# Altium PCB CuC_PCB.PcbDoc (part 3 of 4)
Units mm, origin at the board's own origin, x right, y up, seen from the top; angles counter-clockwise.
Board outline 203.71 x 204.22 mm, 2 copper layers (Top Layer, Bottom Layer); 421 components, 374 nets, 1366 pads, 155 vias.
Unrouted connection lines stored in the file: 2.
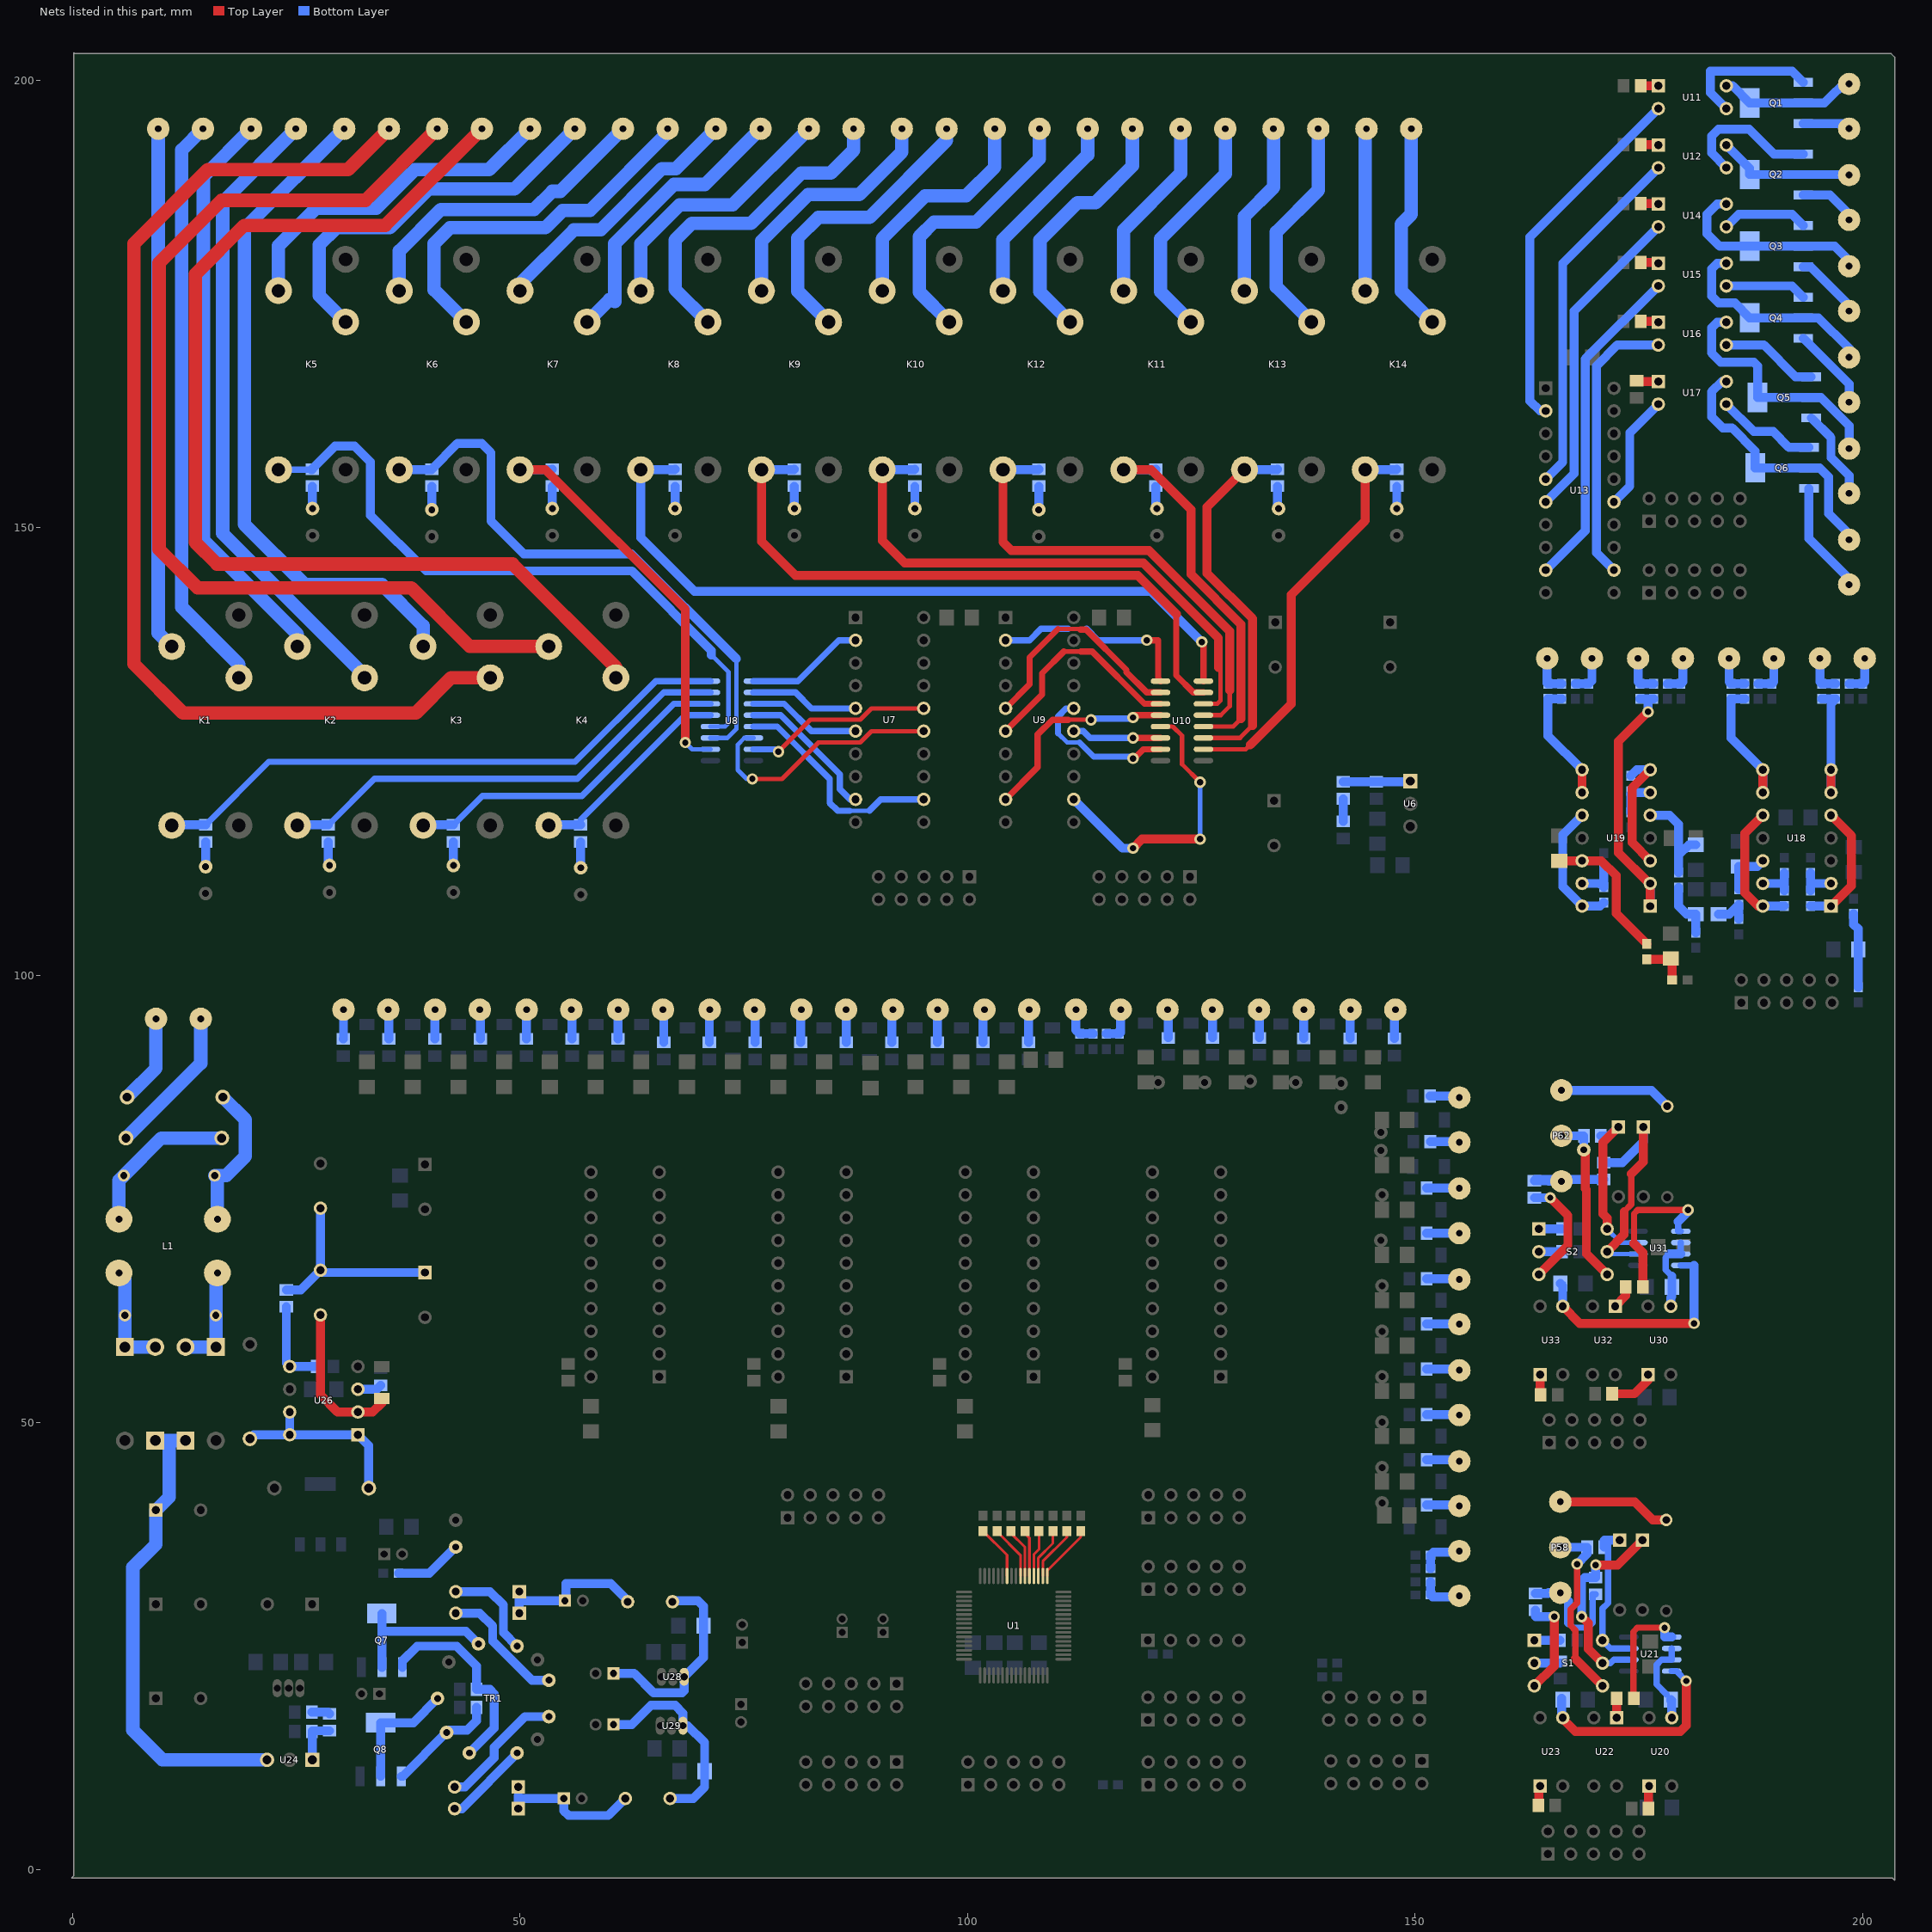
[diagram p3: the nets of this part, all layers, seen from the top]

## Via types
v1: diameter 1.27, hole 0.711, Top Layer to Bottom Layer, 155 vias

## Nets (pads, with @x,y where several pads share a name; then routed paths per layer and width w, separated by ;. In a path a pad name is that pad's centre, name@x,y a point inside that pad or via, vN(x,y) a via of type N, cw(c..) or ccw(c..) an arc to the next point about the centre after c; other vN are vias at no path point) (continued)
NetC52_2: C52.2 R81.2 R82.1 | length 8.4
  Bottom Layer w1: R81.2@199.009,106.846 199.009,105.664 199.52,105.153 C52.2@199.52,102.87 199.517,102.867 R82.1@199.517,98.64
NetC53_2: C53.2 R89.1 U18.12 | length 5.5
  Bottom Layer w1: R89.1@186.182,109.562 C53.2@186.182,112.138 188.211,112.138 U18.12@188.849,112.776
NetC54_2: C54.2 R89.2 R90.1 | length 4.3
  Bottom Layer w1: C54.2@183.896,106.804 185.124,106.804 R89.2@186.182,107.862 R90.1@186.182,106.26
NetC56_2: C56.2 R97.1 U19.5 | length 11.3
  Bottom Layer w1: U19.5@176.276,117.856 178.435,117.856 179.451,116.84 179.451,113.411 ; R97.1@179.451,111.467 179.451,113.411 ; C56.2@181.356,114.557 180.597,114.557 179.451,113.411
NetC57_2: C57.2 R97.2 R98.1 | length 6.4
  Bottom Layer w1: R97.2@179.451,109.767 179.451,107.696 180.343,106.804 C57.2@181.356,106.804 R98.1@181.356,104.736
NetC59_2: C59.2 R105.1 U19.12 | length 16.1
  Top Layer w1: C59.2@166.116,112.773 168.653,112.773 U19.12@168.656,112.776 170.815,112.776 172.466,111.125 172.466,106.895 R105.1@175.895,103.466
NetC60_2: C60.2 R105.2 R106.1 | length 5.2
  Top Layer w1: R105.2@175.895,101.766 178.477,101.766 C60.2@178.562,101.851 178.728,101.685 R106.1@178.728,99.441
NetC62_1: C62.1 D49.2 D51.2 U24.3 | length 53.8
  Bottom Layer w1.5: D51.2@9.229,47.983 10.795,47.983 ; D49.2@12.615,47.983 10.795,47.983 ; U24.3@21.717,12.319 10.033,12.319 6.731,15.621 6.731,33.829 9.311,36.409 C62.1@9.311,40.208 10.795,41.692 10.795,47.983
NetC67_1: C67.1 D51.1 D52.2 L1.4 | length 11.9
  Bottom Layer w1.5: L1.4@5.168,66.723 5.842,66.049 C67.1@5.842,61.976 D52.2@5.842,58.443 D51.1@9.229,58.443
NetC67_2: C67.2 D49.1 D50.2 L1.2 | length 11.7
  Bottom Layer w1.5: D49.1@12.615,58.443 D50.2@16.002,58.443 C67.2@16.002,61.976 16.002,66.557 L1.2@16.168,66.723
NetC68_1: C68.1 L1.3 R127.1 | length 17.8
  Bottom Layer w1.5: L1.3@5.168,72.723 5.168,77.05 C68.1@5.715,77.597 9.906,81.788 R127.1@16.653,81.788
NetC68_2: C68.2 L1.1 R124.1 | length 17
  Bottom Layer w1.5: L1.1@16.168,72.723 16.168,77.304 C68.2@15.875,77.597 17.145,77.597 19.304,79.756 19.304,83.836 R124.1@16.78,86.36
NetC73_1: C73.1 L2.2 L3.1 R132.2 | length 23.4
  Bottom Layer w1: R132.2@23.876,64.831 25.501,64.831 L2.2@27.686,67.016 ; L3.1@27.686,73.954 L2.2@27.686,67.016 ; C73.1@39.37,66.762 27.94,66.762 L2.2@27.686,67.016
NetC74_2: C74.2 U26.3 | length 2.7
  Bottom Layer w1: U26.3@31.877,53.721 33.97,53.721 C74.2@34.417,54.168
NetC78_2: C78.2 C80.1 L4.2 U28.3 | length 22.9
  Bottom Layer w1: C80.1@60.436,21.971 62.738,21.971 64.897,19.812 68.072,19.812 68.326,20.066 U28.3@68.326,21.59 70.488,23.752 C78.2@70.488,27.305 70.488,29.461 69.85,30.099 L4.2@67.016,30.099
NetC82_1: C82.1 D55.2 D56.2 L4.1 | length 16.3
  Bottom Layer w1: D56.2@49.905,28.702 49.905,30.232 50.038,30.099 C82.1@55.007,30.099 55.118,30.21 55.118,32.004 60.111,32.004 L4.1@62.016,30.099
NetC83_2: C83.2 C85.1 L5.2 U29.3 | length 23
  Bottom Layer w1: C85.1@60.436,16.383 60.563,16.256 62.484,16.256 64.643,18.415 67.31,18.415 68.199,17.526 U29.3@68.199,16.129 68.707,16.129 70.615,14.221 C83.2@70.615,11.049 70.615,9.274 69.342,8.001 L5.2@66.762,8.001
NetC87_1: C87.1 D57.2 D58.2 L5.1 | length 15.9
  Bottom Layer w1: D58.2@49.778,6.858 49.778,8.261 50.038,8.001 C87.1@54.88,8.001 54.88,6.62 55.404,6.096 59.857,6.096 L5.1@61.762,8.001
NetD33_1: D33.1 R57.1 | length 2.8
  Bottom Layer w1: D33.1@14.859,112.117 R57.1@14.859,114.874
NetD34_1: D34.1 R62.1 | length 2.6
  Bottom Layer w1: D34.1@42.545,112.244 R62.1@42.545,114.874
NetD35_1: D35.1 R61.1 | length 2.8
  Bottom Layer w1: R61.1@28.575,114.874 28.575,112.244 D35.1@28.702,112.117
NetD36_1: D36.1 R63.1 | length 2.8
  Bottom Layer w1: D36.1@56.769,112.117 R63.1@56.769,114.874
NetD37_1: D37.1 R64.1 | length 2.5
  Bottom Layer w1: D37.1@26.797,152.122 R64.1@26.797,154.625
NetD38_1: D38.1 R65.1 | length 2.6
  Bottom Layer w1: D38.1@40.132,151.995 R65.1@40.132,154.625
NetD39_1: D39.1 R66.1 | length 2.5
  Bottom Layer w1: D39.1@53.594,152.122 R66.1@53.594,154.625
NetD40_1: D40.1 R67.1 | length 2.5
  Bottom Layer w1: D40.1@67.31,152.122 R67.1@67.31,154.625
NetD41_1: D41.1 R68.1 | length 2.5
  Bottom Layer w1: D41.1@80.645,152.122 R68.1@80.645,154.625
NetD42_1: D42.1 R69.1 | length 2.5
  Bottom Layer w1: D42.1@94.107,152.122 R69.1@94.107,154.625
NetD43_1: D43.1 R70.1 | length 2.6
  Bottom Layer w1: D43.1@107.95,151.995 R70.1@107.95,154.625
NetD44_1: D44.1 R71.1 | length 2.6
  Bottom Layer w1: D44.1@121.031,151.995 R71.1@121.031,154.625
NetD45_1: D45.1 R72.1 | length 2.7
  Bottom Layer w1: R72.1@134.62,154.625 134.62,152.122 D45.1@134.747,151.995
NetD46_1: D46.1 R73.1 | length 2.5
  Bottom Layer w1: D46.1@147.955,152.122 R73.1@147.955,154.625
NetD47_2: D47.2 R115.2 S1.5 U21.6 | length 22.7
  Top Layer w1: v1(168.605,28.321) 169.342,27.584 169.342,24.714 S1.5@170.942,23.114 ; v1(170.18,34.087) 172.615,34.087 D47.2@175.387,36.859
  Bottom Layer w0.7: S1.5@170.942,23.114 171.831,23.114 172.212,23.495 U21.6@173.876,23.495
  Bottom Layer w1: v1(168.605,28.321) 168.605,32.332 168.974,32.7 R115.2@170.18,32.7 v1(170.18,34.087)
NetD48_2: D48.2 R117.2 S1.6 U21.7 | length 17.3
  Bottom Layer w0.7: 171.552,36.859 171.552,29.82 170.942,29.21 S1.6@170.942,25.654 171.831,24.765 U21.7@173.876,24.765
  Bottom Layer w1: R117.2@171.13,36.068 171.13,36.83 171.159,36.859 171.552,36.859 D48.2@172.847,36.859
NetD53_2: D53.2 L2.1 U26.2 | length 17.5
  Top Layer w1: L2.1@27.686,62.016 27.686,53.086 29.591,51.181 U26.2@31.877,51.181 33.528,51.181 34.544,52.197 D53.2@34.544,52.708
NetD54_2: D54.2 R131.2 | length 7.6
  Bottom Layer w1: R131.2@36.41,33.147 39.854,33.147 D54.2@42.799,36.092
NetD55_1: D55.1 TR1.6 | length 11.2
  Bottom Layer w1: D55.1@42.805,31.115 46.609,31.115 48.133,29.591 48.133,26.543 TR1.6@49.657,25.019
NetD56_1: D56.1 TR1.8 | length 14.5
  Bottom Layer w1: D56.1@42.805,28.702 45.466,28.702 46.933,27.235 46.933,25.584 51.308,21.209 TR1.8@53.213,21.209
NetD57_1: D57.1 TR1.9 | length 14.5
  Bottom Layer w1: D57.1@42.678,9.271 43.815,9.271 47.117,12.573 47.117,13.716 50.546,17.145 TR1.9@53.213,17.145
NetD58_1: D58.1 TR1.11 | length 9.6
  Bottom Layer w1: D58.1@42.678,6.858 43.48,6.858 49.657,13.035 TR1.11@49.657,13.081
NetD59_2: D59.2 R139.2 S2.5 U31.6 | length 26.2
  Top Layer w0.7: 173.359,73.586 174.164,74.391 174.164,77.771
  Top Layer w1: S2.5@171.45,69.088 173.359,70.997 173.359,73.586 ; 174.164,77.771 175.514,79.121 D59.2@175.514,83.034
  Bottom Layer w0.5: S2.5@171.45,69.088 171.704,68.834 U31.6@174.892,68.834
  Bottom Layer w1: R139.2@171.069,79.055 173.162,79.055 175.514,81.407 D59.2@175.514,83.034
NetD60_2: D60.2 R141.2 S2.6 U31.7 | length 18.8
  Top Layer w1: S2.6@171.45,71.628 171.45,72.847 170.993,73.304 170.993,81.307 D60.2@172.72,83.034
  Bottom Layer w0.5: S2.6@171.45,71.628 172.974,70.104 U31.7@174.892,70.104
  Bottom Layer w1: R141.2@170.749,82.042 171.728,82.042 D60.2@172.72,83.034
NetK1_2: K1.2 R57.2 U8.16 | length 66.9
  Bottom Layer w0.7: R57.2@14.859,116.774 21.91,123.825 56.134,123.825 65.156,132.847 U8.16@71.26,132.847
  Bottom Layer w1: K1.2@11.074,116.716 11.132,116.774 R57.2@14.859,116.774
NetK1_3: K1.3 P25.1 | length 65
  Bottom Layer w1.5: P25.1@14.565,194.564 12.192,192.191 12.192,141.097 18.574,134.715 K1.3@18.574,133.216
NetK1_4: K1.4 P25.2 | length 58.5
  Bottom Layer w1.5: P25.2@9.565,194.564 9.565,138.225 K1.4@11.074,136.716
NetK2_2: K2.2 R61.2 U8.15 | length 52.3
  Bottom Layer w0.7: R61.2@28.575,116.774 33.721,121.92 56.388,121.92 66.045,131.577 U8.15@71.26,131.577
  Bottom Layer w1: K2.2@25.116,116.716 25.174,116.774 R61.2@28.575,116.774
NetK2_3: K2.3 P26.1 | length 71.3
  Bottom Layer w1.5: P26.1@24.95,194.564 16.764,186.378 16.764,149.352 32.616,133.5 K2.3@32.616,133.216
NetK2_4: K2.4 P26.2 | length 64.4
  Bottom Layer w1.5: P26.2@19.95,194.564 14.605,189.219 14.605,148.59 25.116,138.079 K2.4@25.116,136.716
NetK3_2: K3.2 R62.2 U8.14 | length 37.7
  Bottom Layer w0.7: R62.2@42.545,116.774 45.786,120.015 56.896,120.015 67.188,130.307 U8.14@71.26,130.307
  Bottom Layer w1: K3.2@39.157,116.716 39.215,116.774 R62.2@42.545,116.774
NetK3_3: K3.3 P27.1 | length 124.5
  Top Layer w1.5: P27.1@35.334,194.564 30.762,189.992 15.113,189.992 6.858,181.737 6.858,134.747 12.319,129.286 38.354,129.286 42.284,133.216 K3.3@46.657,133.216
NetK3_4: K3.4 P27.2 | length 75.8
  Bottom Layer w1.5: P27.2@30.334,194.564 19.177,183.407 19.177,150.368 25.908,143.637 34.544,143.637 39.157,139.024 K3.4@39.157,136.716
NetK4_2: K4.2 R63.2 U8.13 | length 23.5
  Bottom Layer w0.7: R63.2@56.769,116.774 56.769,117.348 68.458,129.037 U8.13@71.26,129.037
  Bottom Layer w1: K4.2@53.199,116.716 53.257,116.774 R63.2@56.769,116.774
NetK4_3: K4.3 P28.1 | length 122.6
  Top Layer w1.5: P28.1@45.719,194.564 34.924,183.769 19.177,183.769 13.716,178.308 13.716,148.336 16.129,145.923 49.149,145.923 60.699,134.373 K4.3@60.699,133.216
NetK4_4: K4.4 P28.2 | length 117.3
  Top Layer w1.5: P28.2@40.719,194.564 32.718,186.563 16.637,186.563 9.652,179.578 9.652,147.574 13.97,143.256 37.846,143.256 44.386,136.716 K4.4@53.199,136.716
NetK5_2: K5.2 R64.2 U8.12 | length 73.7
  Bottom Layer w0.5: U8.12@71.26,127.767 72.903,127.767 73.279,128.143 73.279,133.858 71.374,135.763
  Bottom Layer w0.7: K5.2@23.002,156.467 R64.2@26.673,156.467
  Bottom Layer w1: R64.2@26.797,156.525 26.739,156.467 26.673,156.467 26.764,156.558 29.337,159.131 31.496,159.131 33.274,157.353 33.274,151.384 39.497,145.161 62.484,145.161 71.374,136.271 71.374,135.763
NetK5_3: K5.3 P29.1 | length 43.8
  Bottom Layer w1.5: K5.3@30.502,172.967 27.559,175.91 27.559,181.61 29.464,183.515 35.433,183.515 39.751,187.833 49.373,187.833 P29.1@56.104,194.564
NetK5_4: K5.4 P29.2 | length 38.5
  Bottom Layer w1.5: K5.4@23.002,176.467 23.002,181.498 27.178,185.674 33.909,185.674 38.227,189.992 46.532,189.992 P29.2@51.104,194.564
NetK6_2: K6.2 R65.2 U8.11 | length 64.5
  Bottom Layer w0.5: U8.11@71.26,126.497 73.157,126.497 74.168,127.508 74.168,135.33
  Bottom Layer w1: K6.2@36.494,156.467 40.074,156.467 R65.2@40.132,156.525 42.992,159.385 45.72,159.385 46.736,158.369 46.736,150.749 50.419,147.066 62.432,147.066 74.168,135.33
NetK6_3: K6.3 P30.1 | length 41.9
  Bottom Layer w1.5: K6.3@43.994,172.967 40.386,176.575 40.386,181.737 42.164,183.515 52.832,183.515 54.737,185.42 57.785,185.42 66.488,194.123 P30.1@66.488,194.564
NetK6_4: K6.4 P30.2 | length 35.1
  Bottom Layer w1.5: K6.4@36.494,176.467 36.494,180.893 41.148,185.547 51.562,185.547 53.594,187.579 54.503,187.579 P30.2@61.488,194.564
NetK7_2: K7.2 R66.2 U8.10 | length 46.6
  Top Layer w1: K7.2@49.985,156.467 52.829,156.467 68.453,140.843 v1(68.453,125.984)
  Bottom Layer w0.5: v1(68.453,125.984) 69.21,125.227 U8.10@71.26,125.227
  Bottom Layer w1: K7.2@49.985,156.467 53.536,156.467 R66.2@53.594,156.525
NetK7_3: K7.3 P31.1 | length 32.2
  Bottom Layer w1.5: K7.3@57.485,172.967 59.989,175.471 60.579,175.262 60.579,181.737 67.183,188.341 70.65,188.341 P31.1@76.873,194.564
NetK7_4: K7.4 P31.2 | length 29.8
  Bottom Layer w1.5: K7.4@49.985,176.467 49.97,176.481 49.97,177.224 56.007,183.261 58.987,183.261 65.821,190.095 67.404,190.095 P31.2@71.873,194.564
NetK8_2: K8.2 R67.2 U10.16 | length 83.7
  Top Layer w0.7: v1(126.174,137.224) 126.111,137.16 125.984,137.16 126.352,136.792 U10.16@126.352,132.847
  Bottom Layer w1: R67.2@67.31,156.525 67.252,156.467 K8.2@63.476,156.467 63.476,148.868 69.469,142.875 120.523,142.875 v1(126.174,137.224)
NetK8_3: K8.3 P32.1 | length 37.2
  Bottom Layer w1.5: K8.3@70.976,172.967 67.31,176.633 67.31,182.118 69.183,183.991 75.787,183.991 81.407,189.611 84.709,189.611 87.258,192.16 P32.1@87.258,194.564
NetK8_4: K8.4 P32.2 | length 29.4
  Bottom Layer w1.5: K8.4@63.476,176.467 63.476,181.713 67.818,186.055 73.749,186.055 P32.2@82.258,194.564
NetK9_2: K9.2 R68.2 U10.15 | length 72.1
  Top Layer w0.7: 123.317,140.335 123.317,133.477 125.217,131.577 U10.15@126.352,131.577
  Top Layer w1: K9.2@76.967,156.467 76.967,148.458 80.772,144.653 118.999,144.653 123.317,140.335
  Bottom Layer w1: K9.2@76.967,156.467 80.587,156.467 R68.2@80.645,156.525
NetK9_3: K9.3 P33.1 | length 33.3
  Bottom Layer w1.5: K9.3@84.467,172.967 81.026,176.408 81.026,182.372 83.312,184.658 89.027,184.658 97.643,193.274 P33.1@97.643,194.564
NetK9_4: K9.4 P33.2 | length 27.9
  Bottom Layer w1.5: K9.4@76.967,176.467 76.967,181.996 82.169,187.198 87.884,187.198 92.643,191.957 P33.2@92.643,194.564
NetK10_2: K10.2 R69.2 U10.14 | length 62.8
  Top Layer w0.5: U10.14@126.352,130.307 127.894,130.307 128.27,130.683 128.27,134.117 128.016,134.371
  Top Layer w1: K10.2@90.459,156.467 90.459,148.555 92.964,146.05 119.634,146.05 128.016,137.668 128.016,134.371
  Bottom Layer w1: K10.2@90.459,156.467 94.049,156.467 R69.2@94.107,156.525
NetK10_3: K10.3 P34.1 | length 31.3
  Bottom Layer w1.5: K10.3@97.959,172.967 94.615,176.311 94.615,182.499 96.266,184.15 100.965,184.15 108.027,191.212 P34.1@108.027,194.564
NetK10_4: K10.4 P34.2 | length 26
  Bottom Layer w1.5: K10.4@90.459,176.467 90.459,182.28 95.25,187.071 99.822,187.071 103.027,190.276 P34.2@103.027,194.564
NetK11_2: K11.2 R71.2 U10.12 | length 43.2
  Top Layer w0.5: U10.12@126.352,127.767 129.672,127.767 130.556,128.651
  Top Layer w1: K11.2@117.441,156.467 120.52,156.467 124.968,152.019 124.968,144.78 130.556,139.192 130.556,128.651
  Bottom Layer w1: K11.2@117.441,156.467 120.973,156.467 R71.2@121.031,156.525
NetK11_3: K11.3 P36.1 | length 26
  Bottom Layer w1.5: K11.3@124.941,172.967 121.539,176.369 121.539,182.245 128.797,189.503 P36.1@128.797,194.564
NetK11_4: K11.4 P36.2 | length 20.7
  Bottom Layer w1.5: K11.4@117.441,176.467 117.441,183.227 123.797,189.583 P36.2@123.797,194.564
NetK12_2: K12.2 R70.2 U10.13 | length 53.3
  Top Layer w0.5: U10.13@126.352,129.037 128.275,129.037 129.286,130.048 129.286,131.826
  Top Layer w1: K12.2@103.95,156.467 103.95,148.399 104.902,147.447 120.264,147.447 129.286,138.425 129.286,131.826
  Bottom Layer w1: K12.2@103.95,156.467 107.892,156.467 R70.2@107.95,156.525
NetK12_3: K12.3 P35.1 | length 28.5
  Bottom Layer w1.5: K12.3@111.45,172.967 108.077,176.34 108.077,182.118 112.268,186.309 114.3,186.309 118.412,190.421 P35.1@118.412,194.564
NetK12_4: K12.4 P35.2 | length 22
  Bottom Layer w1.5: K12.4@103.95,176.467 103.95,182.182 113.412,191.644 P35.2@113.412,194.564
NetK13_2: K13.2 R72.2 U10.11 | length 42.2
  Top Layer w0.5: U10.11@126.352,126.497 130.434,126.497 131.826,127.889
  Top Layer w1: K13.2@130.933,156.467 126.746,152.28 126.746,144.907 131.826,139.827 131.826,127.889
  Bottom Layer w1: K13.2@130.933,156.467 134.562,156.467 R72.2@134.62,156.525
NetK13_3: K13.3 P39.1 | length 25.2
  Bottom Layer w1.5: K13.3@138.433,172.967 134.493,176.907 134.493,183.007 139.181,187.695 P39.1@139.181,194.564
NetK13_4: K13.4 P39.2 | length 19.4
  Bottom Layer w1.5: K13.4@130.933,176.467 130.933,184.781 134.181,188.029 P39.2@134.181,194.564
NetK14_2: K14.2 R73.2 U10.10 | length 45
  Top Layer w0.5: U10.10@126.352,125.227 131.069,125.227 131.572,125.73
  Top Layer w1: 131.572,125.73 136.144,130.302 136.144,142.494 144.424,150.774 K14.2@144.424,156.467
  Bottom Layer w1: K14.2@144.424,156.467 147.897,156.467 R73.2@147.955,156.525
NetK14_3: K14.3 P40.1 | length 23.5
  Bottom Layer w1.5: P40.1@149.566,194.564 149.566,184.999 148.463,183.896 148.463,176.428 K14.3@151.924,172.967
NetK14_4: K14.4 P40.2 | length 18.2
  Bottom Layer w1.5: K14.4@144.424,176.467 144.424,194.422 P40.2@144.566,194.564
NetP7_1: P7.1 R17.1 | length 3.7
  Bottom Layer w1: P7.1@76.183,96.139 76.243,96.08 R17.1@76.243,92.479
NetP7_2: P7.2 R15.1 | length 3.7
  Bottom Layer w1: R15.1@71.145,92.479 71.145,96.101 P7.2@71.183,96.139
NetP8_1: P8.1 R18.1 | length 3.3
  Bottom Layer w1: P8.1@35.266,96.139 35.343,96.062 R18.1@35.343,92.86
NetP8_2: P8.2 R16.1 | length 3.3
  Bottom Layer w1: R16.1@30.226,92.86 30.266,92.9 P8.2@30.266,96.139
NetP9_1: P9.1 R21.1 | length 3.6
  Bottom Layer w1: R21.1@86.437,92.479 P9.1@86.437,96.115
NetP9_2: P9.2 R19.1 | length 3.6
  Bottom Layer w1: R19.1@81.34,92.479 P9.2@81.34,96.066
NetP10_1: P10.1 R22.1 | length 3.3
  Bottom Layer w1: P10.1@45.495,96.139 45.578,96.056 R22.1@45.578,92.86
NetP10_2: P10.2 R20.1 | length 3.3
  Bottom Layer w1: R20.1@40.461,92.86 40.461,96.105 P10.2@40.495,96.139
NetP11_1: P11.1 R25.1 | length 3.7
  Bottom Layer w1: R25.1@96.631,92.479 96.631,96.128 P11.1@96.642,96.139
NetP11_2: P11.2 R23.1 | length 3.6
  Bottom Layer w1: R23.1@91.534,92.479 P11.2@91.534,96.031
NetP12_1: P12.1 R26.1 | length 3.3
  Bottom Layer w1: P12.1@55.725,96.139 55.813,96.05 R26.1@55.813,92.86
NetP12_2: P12.2 R24.1 | length 3.3
  Bottom Layer w1: R24.1@50.696,92.86 50.696,96.11 P12.2@50.725,96.139
NetP13_1: P13.1 R29.1 | length 3.7
  Bottom Layer w1: R29.1@106.825,92.479 106.825,96.094 P13.1@106.871,96.139
NetP13_2: P13.2 R27.1 | length 3.5
  Bottom Layer w1: R27.1@101.728,92.479 P13.2@101.728,95.996
NetP14_1: P14.1 R30.1 | length 3.6
  Bottom Layer w1: R30.1@66.048,92.479 P14.1@66.048,96.045
NetP14_2: P14.2 R28.1 | length 3.3
  Bottom Layer w1: R28.1@60.931,92.86 60.931,96.116 P14.2@60.954,96.139
NetP15_1: P15.1 R37.2 R38.2 | length 4.8
  Bottom Layer w1: R37.2@151.726,32.216 R38.2@151.726,30.734 151.94,30.52 P15.1@154.94,30.52
NetP15_2: P15.2 R33.1 R34.1 | length 4.8
  Bottom Layer w1: R34.1@151.726,33.697 R33.1@151.726,35.179 152.067,35.52 P15.2@154.94,35.52
NetP16_1: P16.1 R35.2 R36.2 | length 4.2
  Bottom Layer w1: R35.2@115.485,93.433 R36.2@116.967,93.433 117.1,93.566 P16.1@117.1,96.139
NetP16_2: P16.2 R31.1 R32.1 | length 4.4
  Bottom Layer w1: P16.2@112.1,96.139 112.1,93.855 R31.1@112.522,93.433 R32.1@114.004,93.433
NetP17_1: P17.1 R43.1 | length 3.7
  Bottom Layer w1: R43.1@151.28,71.141 154.921,71.141 P17.1@154.94,71.16
NetP17_2: P17.2 R41.1 | length 3.7
  Bottom Layer w1: R41.1@151.28,76.2 154.9,76.2 P17.2@154.94,76.16
NetP18_1: P18.1 R44.1 | length 3.2
  Bottom Layer w1: P18.1@127.329,96.139 127.381,96.087 R44.1@127.381,92.987
NetP18_2: P18.2 R42.1 | length 3.1
  Bottom Layer w1: R42.1@122.428,92.987 P18.2@122.428,96.04
NetP19_1: P19.1 R47.1 | length 3.7
  Bottom Layer w1: R47.1@151.28,61.022 154.918,61.022 P19.1@154.94,61
NetP19_2: P19.2 R45.1 | length 3.7
  Bottom Layer w1: R45.1@151.28,66.081 154.859,66.081 P19.2@154.94,66
NetP20_1: P20.1 R48.1 | length 3.2
  Bottom Layer w1: R48.1@137.541,92.898 137.541,96.121 P20.1@137.559,96.139
NetP20_2: P20.2 R46.1 | length 3.2
  Bottom Layer w1: P20.2@132.559,96.139 132.588,96.11 R46.1@132.588,92.987
NetP21_1: P21.1 R51.1 | length 3.7
  Bottom Layer w1: R51.1@151.28,50.903 154.877,50.903 P21.1@154.94,50.84
NetP21_2: P21.2 R49.1 | length 3.5
  Bottom Layer w1: R49.1@151.28,55.962 P21.2@154.818,55.962
NetP22_1: P22.1 R52.1 | length 3.3
  Bottom Layer w1: R52.1@147.701,92.898 147.701,96.052 P22.1@147.788,96.139
NetP22_2: P22.2 R50.1 | length 3.3
  Bottom Layer w1: R50.1@142.748,92.898 142.748,96.099 P22.2@142.788,96.139
NetP23_1: P23.1 R55.1 | length 3.7
  Bottom Layer w1: R55.1@151.28,40.784 154.836,40.784 P23.1@154.94,40.68
NetP23_2: P23.2 R53.1 | length 3.5
  Bottom Layer w1: R53.1@151.28,45.843 P23.2@154.777,45.843
NetP24_1: P24.1 R56.1 | length 3.3
  Bottom Layer w1: R56.1@151.699,81.407 154.853,81.407 P24.1@154.94,81.32
NetP24_2: P24.2 R54.1 | length 3.1
  Bottom Layer w1: R54.1@151.661,86.487 P24.2@154.773,86.487
NetP41_1: P41.1 Q1.2 Q1.4 U11.4 | length 15.6
  Bottom Layer w1: U11.4@184.785,199.354 185.468,199.354 Q1.4@187.373,197.449 Q1.2@193.373,197.449 195.747,197.449 P41.1@198.501,200.203
NetP41_2: P41.2 Q1.3 | length 5.2
  Bottom Layer w1: Q1.3@193.373,195.149 198.447,195.149 P41.2@198.501,195.203
NetP42_1: P42.1 Q2.2 Q2.4 U12.4 | length 15.7
  Bottom Layer w1: U12.4@184.785,192.75 187.373,190.162 Q2.4@187.373,189.448 Q2.2@193.373,189.448 197.931,189.448 P42.1@198.501,190.018
NetP42_2: P42.2 Q2.3 | length 6
  Bottom Layer w1: Q2.3@193.373,187.148 196.371,187.148 P42.2@198.501,185.018
NetP43_1: P43.1 Q3.2 Q3.4 U14.4 | length 21.9
  Bottom Layer w1: U14.4@184.785,186.146 183.769,186.146 182.626,185.003 182.626,182.844 184.023,181.447 Q3.4@187.373,181.447 Q3.2@193.373,181.447 196.886,181.447 P43.1@198.501,179.832
NetP43_2: P43.2 Q3.3 | length 6.9
  Bottom Layer w1: Q3.3@193.373,179.147 194.186,179.147 P43.2@198.501,174.832
NetP44_1: P44.1 Q4.2 Q4.4 U15.4 | length 23.1
  Bottom Layer w1: U15.4@184.785,179.542 183.769,179.542 183.134,178.907 183.134,175.859 183.896,175.097 185.722,175.097 Q4.4@187.373,173.446 Q4.2@193.373,173.446 195.072,173.446 198.501,170.017 P44.1@198.501,169.647
NetP44_2: P44.2 Q4.3 | length 8.6
  Bottom Layer w1: Q4.3@193.373,171.146 198.501,166.018 P44.2@198.501,164.647
NetP46_1: P46.1 Q5.2 Q5.4 U16.4 | length 27.4
  Bottom Layer w1: U16.4@184.785,172.938 183.769,172.938 183.134,172.303 183.134,169.509 184.15,168.493 187.833,168.493 188.262,168.064 Q5.4@188.262,164.556 Q5.2@194.262,164.556 195.326,164.556 198.501,161.381 P46.1@198.501,159.461
NetP46_2: P46.2 Q5.3 | length 9.6
  Bottom Layer w1: Q5.3@194.262,162.256 196.469,160.049 196.469,157.825 198.501,155.793 P46.2@198.501,154.461
NetP48_1: P48.1 Q6.2 Q6.4 U17.4 | length 29.2
  Bottom Layer w1: U17.4@184.785,166.334 184.277,166.334 183.134,165.191 183.134,162.397 184.404,161.127 185.42,161.127 188.008,158.539 Q6.4@188.008,156.682 Q6.2@194.008,156.682 195.199,156.682 196.215,155.666 196.215,151.562 P48.1@198.501,149.276
NetP48_2: P48.2 Q6.3 | length 12
  Bottom Layer w1: Q6.3@194.008,154.382 194.008,148.769 P48.2@198.501,144.276
NetP51_1: P51.1 R86.2 R87.2 | length 4.4
  Bottom Layer w1: R86.2@198.501,132.549 R87.2@200.025,132.549 200.239,132.763 P51.1@200.239,135.382
NetP51_2: P51.2 R80.2 R83.2 | length 4.4
  Bottom Layer w1: P51.2@195.239,135.382 195.239,132.763 R80.2@195.453,132.549 R83.2@196.977,132.549
NetP53_1: P53.1 R94.2 R95.2 | length 4.4
  Bottom Layer w1: R94.2@188.341,132.549 R95.2@189.865,132.549 190.079,132.763 P53.1@190.079,135.382
NetP53_2: P53.2 R88.2 R91.2 | length 4.4
  Bottom Layer w1: P53.2@185.079,135.382 185.079,132.763 R91.2@185.293,132.549 R88.2@186.817,132.549
NetP54_1: P54.1 R102.2 R103.2 | length 4.4
  Bottom Layer w1: R102.2@178.181,132.549 R103.2@179.705,132.549 179.919,132.763 P54.1@179.919,135.382
NetP54_2: P54.2 R96.2 R99.2 | length 4.4
  Bottom Layer w1: P54.2@174.919,135.382 174.919,132.763 R99.2@175.133,132.549 R96.2@176.657,132.549
NetP56_1: P56.1 R110.2 R111.2 | length 4.5
  Bottom Layer w1: R110.2@167.894,132.549 R111.2@169.418,132.549 169.759,132.89 P56.1@169.759,135.382
NetP56_2: P56.2 R104.2 R107.2 | length 4.4
  Bottom Layer w1: P56.2@164.759,135.382 164.759,132.636 R107.2@164.846,132.549 R104.2@166.37,132.549
NetP58_1: P58.1 R118.2 | length 12.7
  Top Layer w1: P58.1@166.23,41.148 174.523,41.148 176.555,39.116 R118.2@178.054,39.116
NetP58_2: P58.2 R117.1 S1.4 | length 20.7
  Top Layer w0.7: 167.919,23.597 167.919,26.772 167.37,27.321 167.37,29.134 168.097,29.861 v1(168.097,34.188)
  Top Layer w1: 167.919,23.597 S1.4@170.942,20.574
  Bottom Layer w1: P58.2@166.23,36.068 R117.1@169.23,36.068 169.23,35.321 v1(168.097,34.188)
NetP58_3: P58.3 R115.1 R121.1 | length 13.2
  Bottom Layer w0.7: 167.157,27.622 167.703,27.076 169.291,27.076 169.84,27.626 169.84,28.635 169.824,28.651 169.824,30.8 R115.1@170.18,30.8
  Bottom Layer w1: R121.1@163.449,30.922 164.856,30.922 164.922,30.988 P58.3@166.23,30.988 167.157,30.06 167.157,27.622
NetP60_1: P60.1 R127.2 | length 16.8
  Bottom Layer w1.5: R127.2@5.953,81.788 14.311,90.146 P60.1@14.311,95.123
NetP60_2: P60.2 R124.2 | length 10.1
  Bottom Layer w1.5: R124.2@6.08,86.36 9.311,89.591 P60.2@9.311,95.123
NetP62_1: P62.1 R142.2 | length 12.6
  Bottom Layer w1: P62.1@166.357,87.122 176.403,87.122 R142.2@178.181,85.344
NetP62_2: P62.2 pad.0@168.849,80.477 R141.1 S2.4 | length 19.1
  Top Layer w1: pad.0@168.849,80.477 169.012,80.315 169.012,76.149 169.139,76.022 169.139,68.859 S2.4@171.45,66.548
  Bottom Layer w1: P62.2@166.357,82.042 R141.1@168.849,82.042 pad.0@168.849,80.477
NetP62_3: P62.3 R139.1 R145.1 | length 10.9
  Bottom Layer w1: P62.3@166.357,76.962 164.922,76.962 164.861,77.023 R145.1@163.449,77.023 ; R139.1@171.069,77.155 163.454,77.155 R145.1@163.449,77.023 ; R145.1@163.449,77.023 R145.1@163.322,77.023 163.449,77.018 R145.1@163.449,77.023
NetQ1_1: Q1.1 U11.3 | length 15.8
  Bottom Layer w1: U11.3@184.785,196.814 183.007,198.592 183.007,201.005 192.117,201.005 Q1.1@193.373,199.749
NetQ2_1: Q2.1 U12.3 | length 15.9
  Bottom Layer w1: U12.3@184.785,190.21 183.134,191.861 183.134,193.766 183.896,194.528 187.325,194.528 190.105,191.748 Q2.1@193.373,191.748
NetQ3_1: Q3.1 U14.3 | length 9.7
  Bottom Layer w1: U14.3@184.785,183.606 186.182,185.003 192.117,185.003 Q3.1@193.373,183.747
NetQ4_1: Q4.1 U15.3 | length 9.1
  Bottom Layer w1: U15.3@184.785,177.002 192.117,177.002 Q4.1@193.373,175.746
NetQ5_1: Q5.1 U16.3 | length 10.9
  Bottom Layer w1: U16.3@184.785,170.398 188.976,170.398 192.518,166.856 Q5.1@194.262,166.856
NetQ6_1: Q6.1 U17.3 | length 11.2
  Bottom Layer w1: U17.3@184.785,163.794 187.833,160.746 189.992,160.746 191.756,158.982 Q6.1@194.008,158.982
NetQ7_1: Q7.1 R134.2 TR1.1 | length 23.2
  Bottom Layer w1: Q7.1@36.844,22.654 36.844,23.382 38.481,25.019 42.926,25.019 45.146,22.799 R134.2@45.146,20.193 46.609,20.193 47.117,19.685 47.117,15.875 TR1.1@44.323,13.081
NetQ7_2: Q7.2 Q7.4 TR1.5 | length 17.4
  Bottom Layer w1: Q7.2@34.544,22.654 34.544,26.67 ; Q7.4@34.544,28.654 34.544,26.67 ; TR1.5@45.339,25.273 43.942,26.67 34.544,26.67
NetQ8_1: Q8.1 R135.1 TR1.2 | length 12.5
  Bottom Layer w1: Q8.1@36.717,10.462 36.878,10.462 TR1.2@41.783,15.367 42.037,15.621 44.069,15.621 45.146,16.698 R135.1@45.146,18.161
NetQ8_2: Q8.2 Q8.4 TR1.3 | length 13.5
  Bottom Layer w1: Q8.2@34.417,10.462 Q8.4@34.417,16.462 38.052,16.462 TR1.3@40.767,19.177
NetR3_1: R3.1 U1.58 | length 6.1
  Top Layer w0.3: R3.1@101.727,37.885 104.406,35.206 U1.58@104.406,32.855
NetR4_1: R4.1 U1.55 | length 6.1
  Top Layer w0.3: R4.1@103.287,37.885 103.251,37.849 105.906,35.194 U1.55@105.906,32.855
NetR5_1: R5.1 U1.54 | length 5.7
  Top Layer w0.3: R5.1@104.848,37.885 104.848,37.646 106.406,36.088 U1.54@106.406,32.855
NetR7_1: R7.1 U1.53 | length 5.2
  Top Layer w0.3: R7.1@106.408,37.885 106.408,37.61 106.906,37.112 U1.53@106.906,32.855
NetR8_1: R8.1 U1.52 | length 5.3
  Top Layer w0.3: U1.52@107.406,32.855 107.406,35.27 107.968,35.832 R8.1@107.968,37.885
NetR9_1: R9.1 U1.51 | length 5.7
  Top Layer w0.3: U1.51@107.906,32.855 107.906,34.881 109.528,36.503 R9.1@109.528,37.885
NetR10_1: R10.1 U1.50 | length 6.1
  Top Layer w0.3: U1.50@108.406,32.855 108.406,34.492 111.089,37.175 R10.1@111.089,37.885
NetR11_1: R11.1 U1.49 | length 6.6
  Top Layer w0.3: U1.49@108.906,32.855 108.906,33.468 112.649,37.211 R11.1@112.649,37.885
NetR58_1: R58.1 R60.1 U6.1 | length 7.5
  Bottom Layer w1: R60.1@141.986,121.6 R58.1@145.669,121.6 149.413,121.6 U6.1@149.479,121.666
NetR59_1: R59.1 R60.2 | length 2.5
  Bottom Layer w1: R59.1@141.986,117.155 R60.2@141.986,119.7
NetR74_1: R74.1 U11.1 | length 2
  Top Layer w1: R74.1@175.194,199.354 U11.1@177.165,199.354
NetR75_1: R75.1 U12.1 | length 2
  Top Layer w1: R75.1@175.194,192.775 177.14,192.775 U12.1@177.165,192.75
NetR76_1: R76.1 U14.1 | length 2
  Top Layer w1: R76.1@175.194,186.197 177.114,186.197 U14.1@177.165,186.146
NetR77_1: R77.1 U15.1 | length 2
  Top Layer w1: R77.1@175.194,179.618 177.089,179.618 U15.1@177.165,179.542
NetR78_1: R78.1 U16.1 | length 1.9
  Top Layer w1: R78.1@175.194,173.04 U16.1@177.063,173.04
NetR79_1: R79.1 U17.1 | length 2.5
  Top Layer w1: R79.1@174.752,166.395 174.752,166.334 U17.1@177.165,166.334
NetR80_1: R80.1 R83.1 U18.6 U18.7 | length 14.7
  Top Layer w1: U18.6@196.469,120.396 U18.7@196.469,122.936
  Bottom Layer w1: R80.1@195.453,130.849 R83.1@196.977,130.849 196.469,130.341 U18.7@196.469,122.936 U18.6@196.469,120.396
NetR84_1: R84.1 R85.2 U18.2 | length 4.3
  Bottom Layer w1: R84.1@194.183,109.435 194.183,110.236 ; R85.2@194.183,111.418 194.183,110.236 ; U18.2@196.469,110.236 194.183,110.236
NetR84_2: R84.2 U18.1 U18.5 | length 14.4
  Top Layer w1: U18.1@196.469,107.696 198.755,109.982 198.755,115.57 U18.5@196.469,117.856
  Bottom Layer w1: R84.2@194.183,107.735 194.222,107.696 U18.1@196.469,107.696
NetR88_1: R88.1 R91.1 U18.8 U18.9 | length 16
  Top Layer w1: U18.9@188.849,120.396 U18.8@188.849,122.936
  Bottom Layer w1: R88.1@186.817,130.849 R91.1@185.293,130.849 185.293,126.492 U18.8@188.849,122.936 U18.9@188.849,120.396
NetR92_1: R92.1 R93.2 U18.13 | length 4.4
  Bottom Layer w1: U18.13@188.849,110.236 191.262,110.236 ; R92.1@191.262,109.435 191.262,110.236 ; R93.2@191.262,111.418 191.262,110.236
NetR92_2: R92.2 U18.10 U18.14 | length 14.6
  Top Layer w1: U18.14@188.849,107.696 188.341,107.696 186.817,109.22 186.817,115.824 U18.10@188.849,117.856
  Bottom Layer w1: U18.14@188.849,107.696 191.223,107.696 R92.2@191.262,107.735
NetR96_1: R96.1 R99.1 U19.1 U19.2 | length 30.2
  Top Layer w1: v1(176.022,129.413) 172.72,126.111 172.72,113.665 176.149,110.236 U19.2@176.276,110.236 U19.1@176.276,107.696
  Bottom Layer w1: R99.1@175.133,130.849 176.149,130.849 ; v1(176.022,129.413) 176.022,130.722 176.149,130.849 ; U19.1@176.276,107.696 U19.2@176.276,110.236 ; R96.1@176.657,130.849 176.149,130.849
NetR100_1: R100.1 R101.2 U19.6 | length 4.3
  Bottom Layer w1: R101.2@174.117,118.198 174.117,120.23 174.283,120.396 U19.6@176.276,120.396
NetR100_2: R100.2 U19.3 U19.7 | length 14.3
  Top Layer w1: U19.3@176.276,112.776 174.244,114.808 174.244,120.904 U19.7@176.276,122.936
  Bottom Layer w1: R100.2@174.117,122.262 174.791,122.936 U19.7@176.276,122.936
NetR104_1: R104.1 R107.1 U19.8 U19.9 | length 16.1
  Top Layer w1: U19.9@168.656,120.396 U19.8@168.656,122.936
  Bottom Layer w1: R104.1@166.37,130.849 R107.1@164.846,130.849 164.846,126.746 U19.8@168.656,122.936 U19.9@168.656,120.396
NetR108_1: R108.1 R109.2 U19.13 | length 4.7
  Bottom Layer w1: U19.13@168.656,110.236 170.649,110.236 R108.1@171.069,109.816 R109.2@171.069,111.926
NetR108_2: R108.2 U19.10 U19.14 | length 14.5
  Bottom Layer w1: U19.10@168.656,117.856 166.497,115.697 166.497,109.855 U19.14@168.656,107.696 170.649,107.696 R108.2@171.069,108.116
NetR112_1: R112.1 U20.1 | length 2.5
  Top Layer w1: R112.1@176.083,6.858 U20.1@176.083,9.332
NetR113_2: R113.2 U20.3 U21.2 U21.3 | length 9.1
  Bottom Layer w0.7: R113.2@178.105,19.609 176.976,20.738 176.976,22.925 177.546,23.495 U21.3@178.676,23.495 U21.2@178.676,24.765
  Bottom Layer w1: R113.2@178.565,19.05 178.565,18.948 178.689,18.948 U20.3@178.689,17.018
NetR114_1: R114.1 U22.1 | length 2.2
  Top Layer w1: U22.1@172.508,17.018 172.508,18.051 172.532,18.075 R114.1@172.532,19.177
NetR114_2: R114.2 U21.1 | length 13
  Top Layer w0.7: R114.2@174.406,19.203 174.406,20.473 174.406,26.609 174.463,26.666 174.463,26.699 174.841,27.076 v1(177.876,27.076)
  Top Layer w1: R114.2@174.406,19.203 R114.2@174.432,19.177
  Bottom Layer w1: v1(177.876,27.076) 177.876,26.035 U21.1@178.676,26.035
NetR119_1: R119.1 U23.1 | length 2.1
  Top Layer w1: R119.1@163.83,7.305 U23.1@163.83,9.398
NetR120_2: R120.2 U21.4 U23.3 | length 24
  Top Layer w1: U23.3@166.433,16.954 167.894,15.494 179.616,15.494 180.289,16.167 v1(180.289,21.133)
  Bottom Layer w0.7: U21.4@178.676,22.225 179.197,22.225 v1(180.289,21.133)
  Bottom Layer w1: R120.2@166.367,19.177 166.367,17.148 U23.3@166.497,17.018
NetR121_2: R121.2 S1.3 | length 11.4
  Top Layer w1: S1.3@163.322,20.574 165.544,22.796 v1(165.544,28.321)
  Bottom Layer w1: R121.2@163.449,29.022 163.449,28.346 163.474,28.321 v1(165.544,28.321)
NetR122_1: R122.1 S1.2 | length 2.9
  Bottom Layer w1: S1.2@163.322,23.114 R122.1@166.182,23.114
NetR123_2: R123.2 S1.1 | length 2.9
  Bottom Layer w1: S1.1@163.322,25.654 R123.2@166.182,25.654
NetR125_2: R125.2 R126.2 U24.1 | length 5.1
  Bottom Layer w1: U24.1@26.797,12.319 26.797,15.56 R126.2@28.702,15.56
NetR126_1: R126.1 R128.2 | length 2.1
  Bottom Layer w1: R128.2@26.731,17.653 28.509,17.653 R126.1@28.702,17.46
NetR129_2: R129.2 R130.2 U26.1 U26.7 U26.8 | length 21.3
  Bottom Layer w1: R130.2@19.812,48.192 20.261,48.641 U26.8@24.257,48.641 ; U26.7@24.257,51.181 U26.8@24.257,48.641 ; R129.2@33.088,42.672 33.088,47.43 U26.1@31.877,48.641 U26.8@24.257,48.641
NetR132_1: R132.1 R133.2 U26.5 | length 9.8
  Bottom Layer w1: R132.1@23.876,62.931 23.876,56.642 U26.5@24.257,56.261 R133.2@27.244,56.261
NetR136_1: R136.1 U30.1 | length 5.3
  Top Layer w1: R136.1@172.019,53.213 174.498,53.213 176.022,54.737 U30.1@176.022,55.372
NetR137_2: R137.2 U30.3 U31.2 U31.3 | length 8.9
  Bottom Layer w0.7: 178.373,68.834 177.992,68.453 177.992,67.058 178.692,66.358 ; U31.3@179.692,68.834 U31.2@179.692,70.104
  Bottom Layer w1: 178.373,68.834 U31.3@179.692,68.834 ; U30.3@178.562,62.992 178.562,63.957 178.692,64.087 R137.2@178.692,65.151 178.692,66.358
NetR138_1: R138.1 U32.1 | length 2.7
  Top Layer w1: U32.1@172.36,62.992 173.548,64.18 R138.1@173.548,65.151
NetR138_2: R138.2 U31.1 | length 18
  Top Layer w0.7: 174.459,70.004 174.459,73.343 174.872,73.755 v1(180.499,73.755)
  Top Layer w1: 174.459,70.004 175.448,69.015 R138.2@175.448,65.151
  Bottom Layer w0.7: 179.4,72.466 179.4,71.374 U31.1@179.692,71.374
  Bottom Layer w1: 179.4,72.466 180.594,73.66 v1(180.499,73.755)
NetR143_1: R143.1 U33.1 | length 2.3
  Top Layer w1: U33.1@163.957,55.372 163.957,53.152 R143.1@164.023,53.086
NetR144_2: R144.2 U31.4 U33.3 | length 26.1
  Top Layer w1: U33.3@166.497,62.992 168.402,61.087 v1(181.178,61.087)
  Bottom Layer w0.7: U31.4@179.692,67.564 181.153,67.564
  Bottom Layer w1: R144.2@166.24,65.532 166.497,65.275 U33.3@166.497,62.992 ; 181.153,67.564 181.178,67.539 v1(181.178,61.087)
NetR145_2: R145.2 S2.3 | length 12.5
  Top Layer w1: S2.3@163.83,66.548 167.069,69.787 167.069,73.154 v1(165.1,75.123)
  Bottom Layer w1: R145.2@163.322,75.123 v1(165.1,75.123)
NetR146_1: R146.1 S2.2 | length 2.6
  Bottom Layer w1: S2.2@163.83,69.088 R146.1@166.436,69.088
NetR147_2: R147.2 S2.1 | length 2.6
  Bottom Layer w1: S2.1@163.83,71.628 R147.2@166.436,71.628
NetU7_2: U7.2 U8.1 | length 13.3
  Bottom Layer w0.7: U8.1@76.06,132.847 81.031,132.847 85.598,137.414 U7.2@87.476,137.414
NetU7_5: U7.5 U8.2 | length 12.2
  Bottom Layer w0.7: U8.2@76.06,131.577 80.767,131.577 82.55,129.794 U7.5@87.476,129.794
NetU7_6: U7.6 U8.3 | length 12.7
  Bottom Layer w0.7: U8.3@76.06,130.307 79.497,130.307 82.55,127.254 U7.6@87.476,127.254
NetU7_9: U7.9 U8.4 | length 16.3
  Bottom Layer w0.7: U8.4@76.06,129.037 79.116,129.037 85.725,122.428 85.725,120.777 86.868,119.634 U7.9@87.476,119.634
NetU7_12: U7.12 U8.5 | length 25
  Bottom Layer w0.5: 86.831,118.364 89.027,118.364
  Bottom Layer w0.7: U8.5@76.06,127.767 78.735,127.767 84.582,121.92 84.582,119.253 85.471,118.364 86.831,118.364 ; 89.027,118.364 90.297,119.634 U7.12@95.096,119.634
NetU7_15: U7.15 U8.6 | length 28.3
  Top Layer w0.5: v1(75.946,121.92) 79.248,121.92 83.328,126 87.995,126 89.249,127.254 U7.15@95.096,127.254
  Bottom Layer w0.5: v1(75.946,121.92) 75.311,121.92 74.3,122.931 74.3,125.735 75.062,126.497 U8.6@76.06,126.497
NetU7_16: U7.16 U8.7 | length 21.1
  Top Layer w0.5: v1(78.867,124.968) 82.439,128.54 87.995,128.54 89.249,129.794 U7.16@95.096,129.794
  Bottom Layer w0.7: U8.7@76.06,125.227 78.481,125.227 78.74,124.968 v1(78.867,124.968)
NetU9_2: U9.2 U10.1 | length 22.8
  Top Layer w0.7: v1(120.015,137.414) 121.285,137.414 121.285,133.113 U10.1@121.552,132.847
  Bottom Layer w0.5: 111.215,138.684 113.284,138.684
  Bottom Layer w0.7: U9.2@104.24,137.414 106.934,137.414 108.204,138.684 111.215,138.684 ; 113.284,138.684 114.554,137.414 v1(120.015,137.414)
NetU9_5: U9.5 U10.2 | length 25.8
  Top Layer w0.5: 110.093,138.668 112.379,138.668 112.447,138.6 112.588,138.6
  Top Layer w0.7: U9.5@104.24,129.794 106.934,132.488 106.934,135.509 110.093,138.668 ; 112.588,138.6 113.241,138.6 117.729,134.112 117.729,133.858 120.01,131.577 U10.2@121.552,131.577
NetU9_6: U9.6 U10.3 | length 24.8
  Top Layer w0.5: 110.744,136.144 112.649,136.144
  Top Layer w0.7: U9.6@104.24,127.254 108.331,131.345 108.331,133.731 110.744,136.144 ; 112.649,136.144 113.919,136.144 119.756,130.307 U10.3@121.552,130.307
NetU9_9: U9.9 U10.4 | length 23.5
  Top Layer w0.5: 111.215,128.524 v1(113.792,128.524)
  Top Layer w0.7: U9.9@104.24,119.634 107.823,123.217 107.823,126.873 109.474,128.524 111.215,128.524 ; v1@118.618,129.032 118.623,129.037 U10.4@121.552,129.037
  Bottom Layer w0.7: v1(113.792,128.524) 113.919,128.651 118.491,128.651 v1@118.618,129.032
  other v1: 118.491,128.778
NetU9_12: U9.12 U10.5 | length 32
  Top Layer w0.5: U10.5@121.552,127.767 122.931,127.767 123.952,126.746 123.952,123.571 v1(125.984,121.539)
  Top Layer w1: v1(118.491,114.173) 119.507,115.189 v1(125.984,115.189)
  Bottom Layer w0.5: v1(125.984,115.189) v1(125.984,121.539)
  Bottom Layer w1: U9.12@111.86,119.634 117.321,114.173 v1(118.491,114.173)
NetU9_15: U9.15 U10.6 | length 10.1
  Top Layer w0.7: v1(118.491,126.492) 118.491,126.428 118.496,126.497 U10.6@121.552,126.497
  Bottom Layer w0.7: U9.15@111.86,127.254 112.903,127.254 113.665,126.492 v1(118.491,126.492)
NetU9_16: U9.16 U10.7 | length 17
  Top Layer w0.7: v1@118.299,124.398 v1(118.491,124.206) 118.618,124.206 119.639,125.227 U10.7@121.552,125.227
  Bottom Layer w0.5: 110.109,127 111.125,125.984 112.504,125.984
  Bottom Layer w0.7: 110.109,127 110.109,128.905 110.998,129.794 U9.16@111.86,129.794 ; 112.504,125.984 114.09,124.398 v1@118.299,124.398
NetU11_2: U11.2 U13.2 | length 40.8
  Bottom Layer w1: U13.2@164.592,163.032 163.957,163.032 162.814,164.175 162.814,182.463 U11.2@177.165,196.814
NetU12_2: U12.2 U13.5 | length 40
  Bottom Layer w1: U13.5@164.592,155.412 166.497,157.317 166.497,179.542 U12.2@177.165,190.21
NetU13_6: U13.6 U14.2 | length 35.9
  Bottom Layer w1: U13.6@164.592,152.872 167.751,156.031 167.751,174.192 U14.2@177.165,183.606
NetU13_9: U13.9 U15.2 | length 37
  Bottom Layer w1: U13.9@164.592,145.252 169.005,149.665 169.005,168.842 U15.2@177.165,177.002
NetU13_12: U13.12 U16.2 | length 31.5
  Bottom Layer w1: U13.12@172.212,145.252 170.259,147.205 170.259,168.064 172.593,170.398 U16.2@177.165,170.398
NetU13_15: U13.15 U17.2 | length 13
  Bottom Layer w1: U13.15@172.212,152.872 173.99,154.65 173.99,160.619 U17.2@177.165,163.794